# Altium PCB Copy of Mach cum LED.PcbDoc
Units mil, origin at the board's own origin, x right, y up, seen from the top; angles counter-clockwise.
Board outline 2100 x 2100 mil, 2 copper layers (Top Layer, Bottom Layer); 15 components, 9 nets, 45 pads, 21 vias.
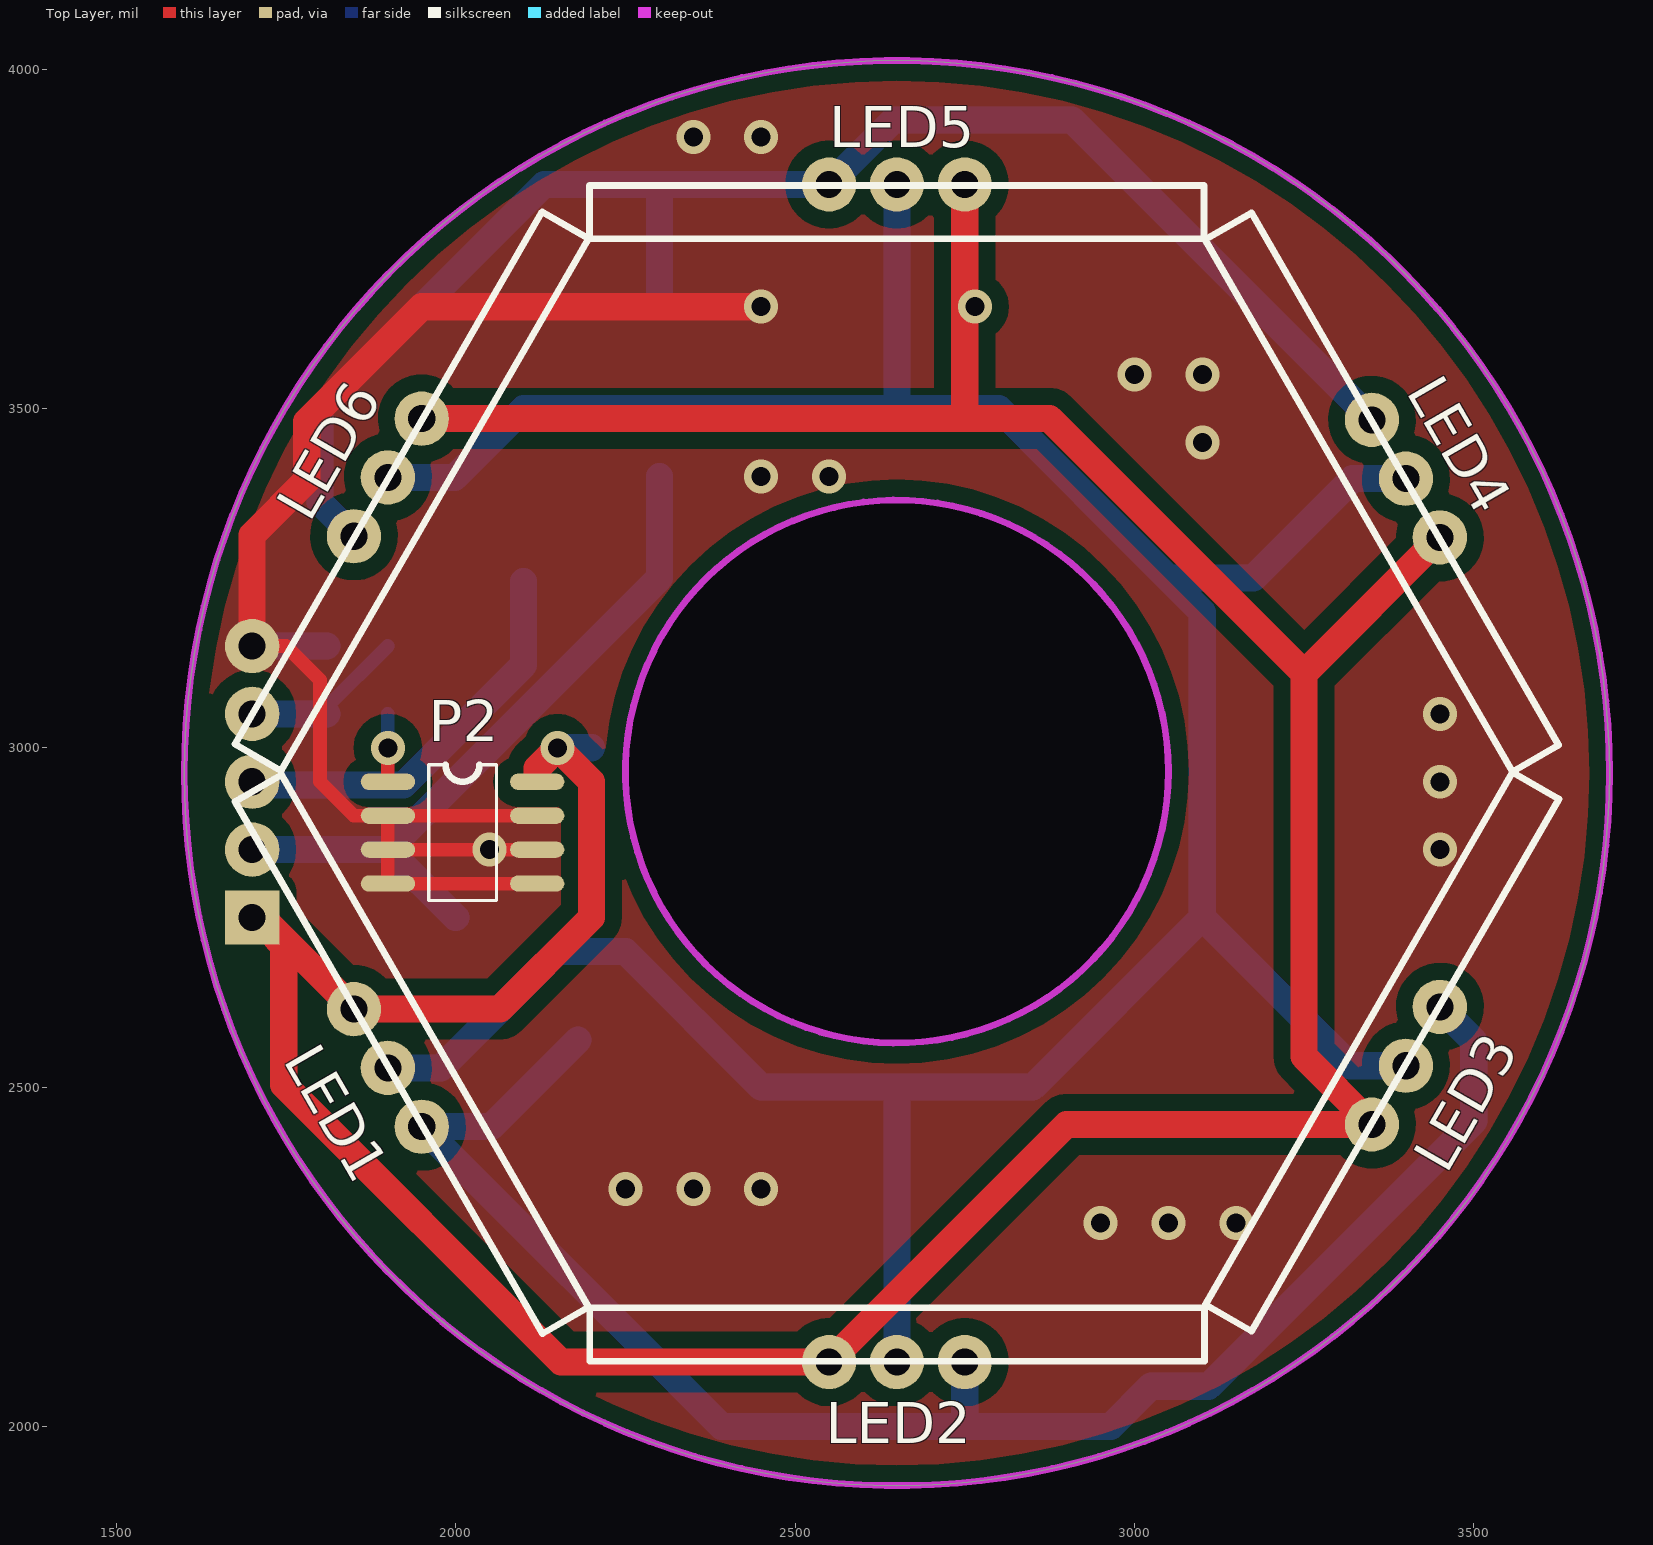
[diagram p0: Top Layer view]
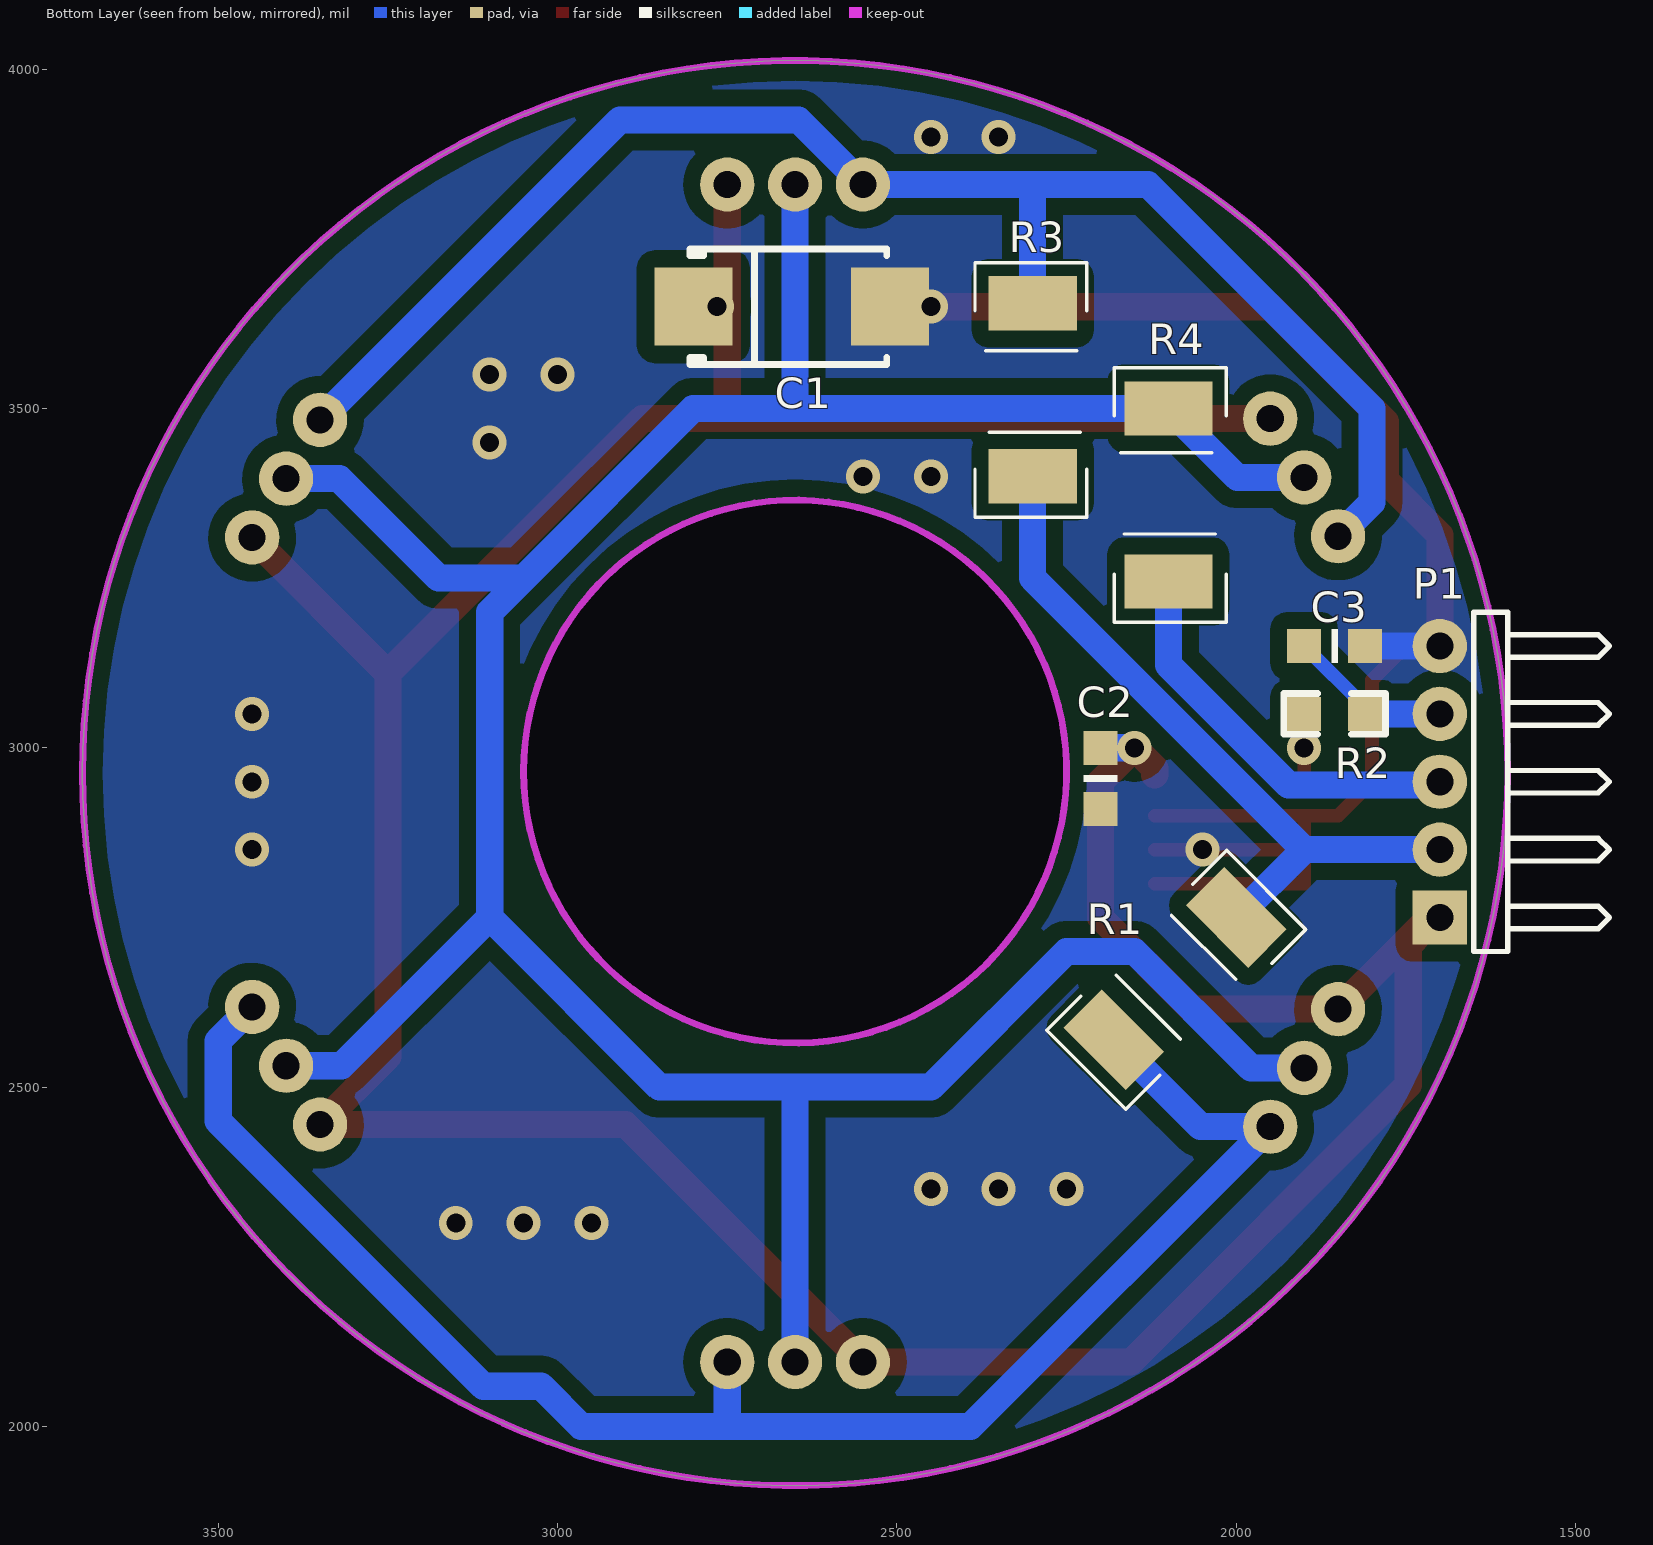
[diagram p1: Bottom Layer view, seen from below]

## Layer stack, top to bottom
Top Solder: solder mask 0.4, Solder Resist, Dk 3.5
Top Layer: signal copper 1.4
Dielectric 1: dielectric 12.6, FR-4, Dk 4.8
Bottom Layer: signal copper 1.4
Bottom Solder: solder mask 0.4, Solder Resist, Dk 3.5

## Board outline
2650,1912.75 cw(c2650,2962.76) 1600,2962.76 cw(c2650,2962.76) 2650,4012.76 cw(c2650,2962.76) 3700,2962.76 cw(c2650,2962.76)
cut-out: 2650,2564.97 cw(c2650,2965) 2249.97,2965 cw(c2650,2965) 2650,3365.03 cw(c2650,2965) 3050.03,2965 cw(c2650,2965)

## Design rules (kind name [scope] priority, off if disabled: settings)
Clearance [All] p1: gap=10 ignorepadtopadclearanceinfootprint=FALSE except(0: Arc-Hole Track-Hole SMDPad-Hole THPad-Hole Via-Hole Fill-Hole Poly-Hole Region-Hole Text-Hole; 25: Arc-Poly Track-Poly SMDPad-Poly THPad-Poly Via-Poly Fill-Poly Poly-Poly)
ComponentClearance [All] p1 off: gap=10 collisioncheckmode=3 verticalgap=10 showdistances=FALSE
Height [All] p1 off: minheight=0 maxheight=1000 prefheight=500
HoleSize [All] p1: absolutevalues=TRUE maxlimit=200 minlimit=1 maxpercent=80.000 minpercent=20.000
PolygonConnect [All] p1: connectstyle=Direct reliefconductorwidth=10 reliefentries=4 polygonreliefangle="90 Angle" airgapwidth=10
RoutingVias [All] p1: holewidth=28 width=50 viastyle="Through Hole" minholewidth=28 minwidth=50 maxholewidth=28 maxwidth=50
SolderMaskExpansion [All] p1: expansion=4
Width [All] p1: maxlimit=100 minlimit=10 preferedwidth=20
27 further rules are at their usual default settings.

## Components (designator, comment, footprint, x,y, rotation, side; value= is the part's Value field where it differs from the comment)
C1 "Tụ hóa chân dán 107" SMC_D/WA 2800,3650 r180 bottom value=107
C2 "Tụ điện dán 0805 104" 0805C 2200,3000 r270 bottom value=104
C3 "Tụ điện dán 0805 104" 0805C 1900,3150 r180 bottom value=104
LED1 "Cụm đèn LED" LED_5730 1850,2615 r300 top
LED2 "Cụm đèn LED" LED_5730 2550,2095 r0 top
LED3 "Cụm đèn LED" LED_5730 3350,2445 r60 top
LED4 "Cụm đèn LED" LED_5730 3450,3310 r120 top
LED5 "Cụm đèn LED" LED_5730 2750,3830 r180 top
LED6 "Cụm đèn LED" LED_5730 1950,3485 r240 top
P1 "Jump đực chân thẳng, 2.54mm 5P" HDR1X5H 1700,2750 r90 bottom value=5P
P2 "IC đo nhiệt độ, chân dán 8P LM35" SO-8 1900,2950 r0 top value=LM35
R1 "Điện trở dán 2512 4R7" 2512 2000,2750 r315 bottom value=4R7
R2 "Điện trở dán 0805 1K" 0805DD 1900,3050 r180 bottom value=1K
R3 "Điện trở dán 2512 4R7" 2512 2300,3400 r90 bottom value=4R7
R4 "Điện trở dán 2512 4R7" 2512 2100,3500 r270 bottom value=4R7

## Footprints (in the part's own frame and the unit in brackets; to place one, negate y for a bottom-side part, rotate by r counter-clockwise, add the part's x,y. Pads: shape width x height; smd on the part's side, far side on the other; paste and mask are expansions set on the pad)
0805C [mil]
  rect 50x50 smd: 1(0,0) 2(90,0)
  silkscreen extent 40,-25 50,25, body extent 6,-25 84,25, height 31
0805DD [mil]
  rect 50x50 smd: 1(0,0) 2(90,0)
  silkscreen extent -30,-30 120,30, body extent 4,-25 82,25, height 31
2512 [mil]
  rect 80x130 smd: 1(0,0) 2(255,0)
  silkscreen extent -60,-80 315,85
HDR1X5H [mil] "Connector; Header; 5 Position; Right Angle"
  rect 80x80 hole 40: 1(0,0)
  round 80 hole 40: 2(100,0) 3(200,0) 4(300,0) 5(400,0)
  silkscreen extent -50,-250 450,-50
LED_5730 [mil]
  round 80 hole 40: 1(0,0) 2(100,0) 3(200,0)
  silkscreen extent -352,1 553,80, body extent -350,20 550,72, height 1923
SMC_D/WA [mil]
  rect 115x115 smd: 1(0,0) 2(290,0)
  silkscreen extent -5,-85 285,85, body extent 1,-84 289,85, height 75
SO-8 [mil]
  oval 80x24 smd: 1(0,0) 2(0,-50) 3(0,-100) 4(0,-150) 5(220,-150) 6(220,-100) 7(220,-50) 8(220,0)
  silkscreen extent 60,-175 160,25, body extent -2,-172 225,21, height 57

## Part data
C1: library part "Cap Pol1", "Polarized Capacitor (Radial)", Type1="T? hóa chân c?m", Type2="T? hóa chân dán"
C2 C3: library part CAP, Type1="T? di?n dán 0805", Type2="T? di?n chân c?m"
LED1 LED2 LED3 LED4 LED5 LED6: library part "Header 3", "Header, 3-Pin", LatestRevisionDate=17-Jul-2002, LatestRevisionNote="Re-released for DXP Platform.", Publisher="Altium Limited"
P1: library part "Header 5H", "Header, 5-Pin, Right Angle", LatestRevisionDate=17-Jul-2002, LatestRevisionNote="Re-released for DXP Platform.", Publisher="Altium Limited"
P2: library part "Header 4X2", "Header, 4-Pin, Dual row", LatestRevisionDate=17-Jul-2002, LatestRevisionNote="Re-released for DXP Platform.", Publisher="Altium Limited"
R1 R2 R3 R4: library part "Res Semi", "Semiconductor Resistor", Type1="Ði?n tr? dán 0805", Type2="Ði?n tr? chân c?m 1/4W", Type3="Ði?n tr? chân c?m 2W", Type4="Ði?n tr? dán 2512"

## Via types
v1: diameter 50, hole 28, Top Layer to Bottom Layer, 21 vias

## Nets (pads, with @x,y where several pads share a name; then routed paths per layer and width w, separated by ;. In a path a pad name is that pad's centre, name@x,y a point inside that pad or via, vN(x,y) a via of type N, cw(c..) or ccw(c..) an arc to the next point about the centre after c; other vN are vias at no path point)
GND: C1.2 C2.2 C3.2 P1.5 P2.2 P2.3 P2.4 P2.5 P2.6 P2.7 | length 2365
  Top Layer w20: P1.5 1750,3150 1800,3100 1800,2950 1850,2900 P2.2 ; P2.5 P2.4 P2.3 ; P2.6 v1(2050,2850) P2.3 ; P2.7 P2.2 ; P2.3 P2.2
  Top Layer w40: P1.5 1700,3313.65 1780.53,3394.19 1780.53,3480.53 1950,3650 v1(2450,3650)
  Bottom Layer w40: P1.5 C3.2
  other v1: 2950,2300 3050,2300 3150,2300 2250,2350 2350,2350 2450,2350 3450,2850 3450,2950 3450,3050 2450,3400 2550,3400 3100,3450 3000,3550 3100,3550 2350,3900 2450,3900
LAMP_TEMP_ADC: C3.1 P1.4 R2.2 | length 247.3
  Bottom Layer w20: R2.2 1810,3060 C3.1
  Bottom Layer w40: P1.4 R2.2
LED_LAMP1: P1.2 R1.1 R3.1 | length 1057.1
  Bottom Layer w40: P1.2 1900,2850 ; R1.1 1900,2850 ; R3.1 2300,3250 1900,2850
LED_LAMP2: P1.3 R4.2 | length 598.3
  Bottom Layer w40: P1.3 1705,2945 1922.78,2945 2100,3122.22 R4.2
NetLED1_2: LED1.2 LED2.2 LED3.2 LED4.2 LED5.2 LED6.2 R4.1 | length 4810
  Bottom Layer w40: LED1.2 1978.4,2528.4 2150,2700 2250,2700 2450,2500 2650,2500 ; LED6.2 1998.4,3398.4 R4.1 2650,3500 ; LED2.2 2650,2500 ; LED5.2 2650,3500 ; LED3.2 3318.4,2531.6 3100,2750 ; LED4.2 3321.6,3396.6 3175,3250 3050,3250 ; 2650,2500 2850,2500 3100,2750 ; 2650,3500 2800,3500 3050,3250 ; 3050,3250 3100,3200 3100,2750
NetLED1_3: LED1.3 LED2.3 LED3.3 R1.2 | length 2486.6
  Bottom Layer w40: R1.2 2052.42,2441.79 LED1.3 2391.79,2000 2750,2000 ; LED2.3 2750,2000 ; LED3.3 3500,2568.21 3500,2450 3109.24,2059.24 3024.25,2059.24 2965.01,2000 2750,2000
NetLED4_3: LED4.3 LED5.3 LED6.3 R3.2 | length 2293
  Bottom Layer w40: LED6.3 1800,3361.79 1800,3500 2130,3830 2300,3830 ; R3.2 2300,3830 ; LED4.3 2908.21,3925 2645,3925 LED5.3 2300,3830
NetP2_1: P2.1 R2.1 | length 100
  Top Layer w20: P2.1 v1(1900,3000)
  Bottom Layer w20: v1(1900,3000) R2.1
POWER: C1.1 C2.1 LED1.1 LED2.1 LED3.1 LED4.1 LED5.1 LED6.1 P1.1 P2.8 | length 5926.6
  Top Layer w40: P1.1 P1.1@1705,2750 ; P1.1@1715.37,2739.63 P1.1@1705,2750 ; P1.1@1736.11,2718.89 1746.48,2708.52 1746.48,2503.52 2155,2095 LED2.1 2900,2445 LED3.1 3250,2545 3250,3110 ; LED6.1 2750,3485 ; P2.8@2120,2960 2120,2970 v1(2150,3000) 2200,2950 2200,2750 2065,2615 LED1.1 1715,2750 P1.1@1705,2750 ; LED5.1 2750,3485 ; LED4.1 3250,3110 ; 2750,3485 2875,3485 3250,3110
  Bottom Layer w40: v1(2150,3000) C2.1
  other v1: 2765,3650

## Polygon pours and split planes (outlines as drawn)
GND on Bottom Layer "Bottom Layer-No Net" (solid, remove dead copper, pour order 0): 1550,4050 3750,4050 3750,1900 1550,1900
GND on Top Layer "Bottom Layer-No Net" (solid, remove dead copper, pour order 2): 3750,4050 1550,4050 1550,1900 3750,1900

## Keep-outs
Keep-Out Layer:
  circle w10: c2650,2965 r400.03
  circle w10: c2650,2962.76 r1050